# Altium PCB PCB3.PcbDoc
Units mm, origin at the board's own origin, x right, y up, seen from the top; angles counter-clockwise.
Board outline 57 x 43 mm, 2 copper layers (Top Layer, Bottom Layer); 20 components, 11 nets, 58 pads, 0 vias.
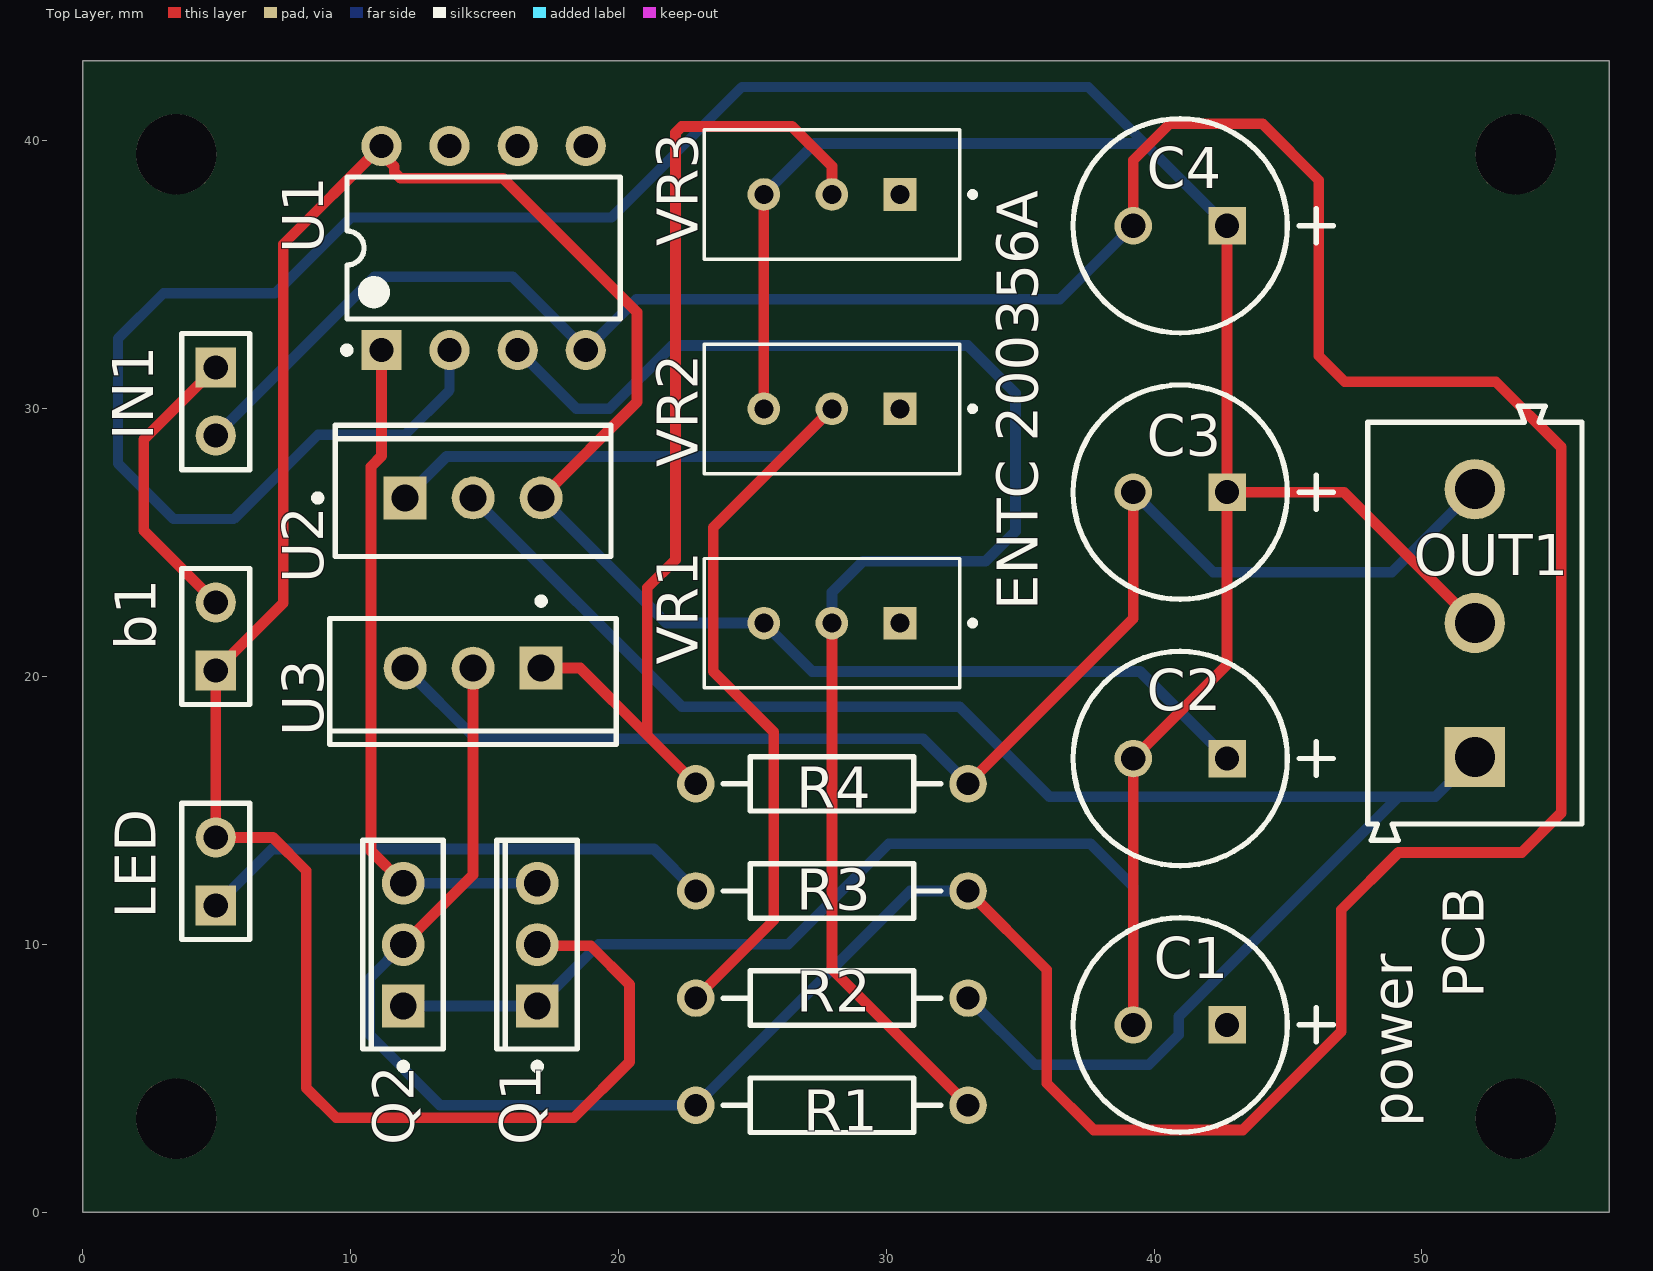
[diagram p0: Top Layer view]
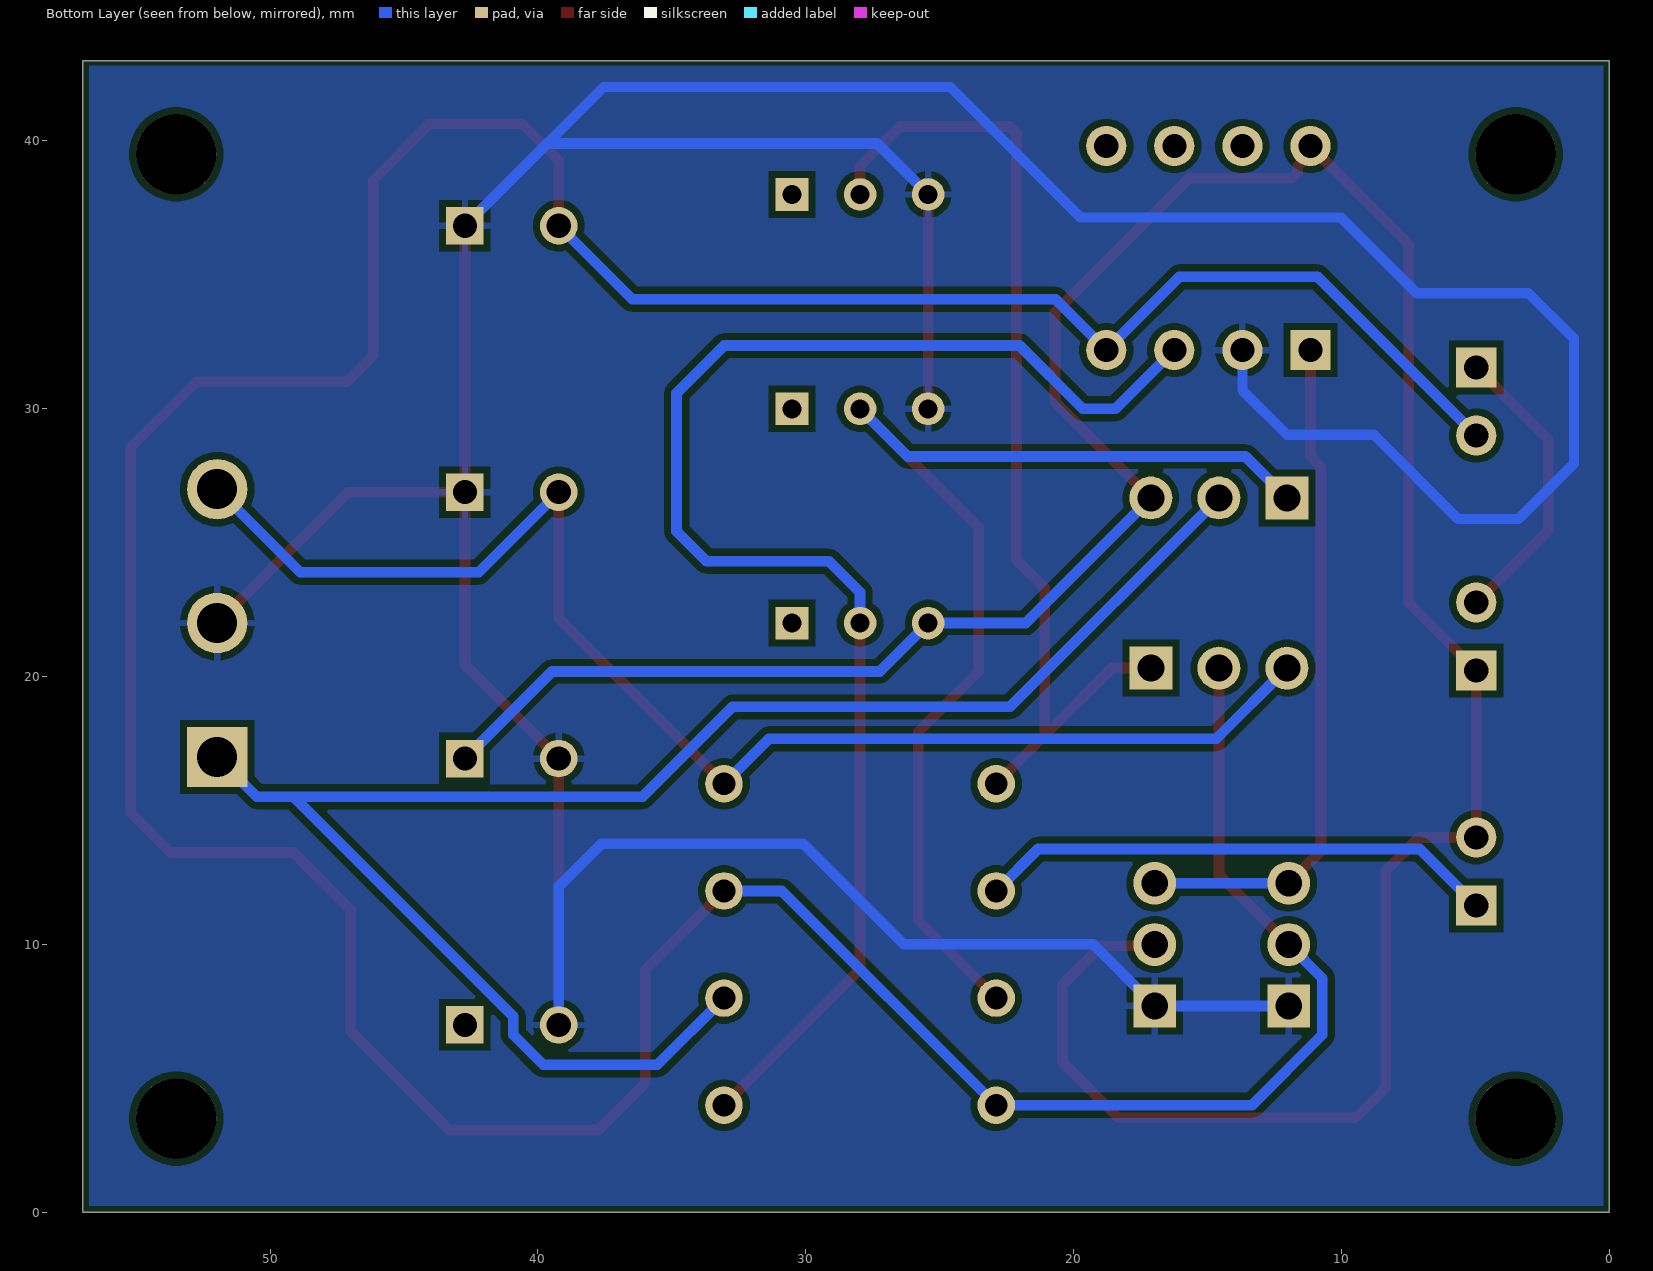
[diagram p1: Bottom Layer view, seen from below]

## Layer stack, top to bottom
Top Solder: solder mask 0.0102, Solder Resist, Dk 3.5
Top Layer: signal copper 0.0356
Dielectric 1: dielectric 0.32, FR-4, Dk 4.8
Bottom Layer: signal copper 0.0356
Bottom Solder: solder mask 0.0102, Solder Resist, Dk 3.5

## Board outline
0,0 57,0 56.998,43 0,43

## Design rules (kind name [scope] priority, off if disabled: settings)
Clearance [All] p1: gap=0.254 ignorepadtopadclearanceinfootprint=FALSE
PolygonConnect [All] p1: connectstyle=Relief reliefconductorwidth=0.254 reliefentries=4 polygonreliefangle="90 Angle" airgapwidth=0.254
RoutingVias [All] p1: holewidth=0.711 width=1.27 viastyle="Through Hole" minholewidth=0.711 minwidth=1.27 maxholewidth=0.711 maxwidth=1.27
SolderMaskExpansion [All] p1: expansion=0.102 istentingtop=FALSE
Width [All] p1: maxlimit=0.508 minlimit=0.254 preferedwidth=0.4
30 further rules are at their usual default settings.

## Components (designator, comment, footprint, x,y, rotation, side; value= is the part's Value field where it differs from the comment)
b1 "Header 2" HDR1X2 4.975,20.23 r90 top
C1 "ECA1HM101" CAPPR65-350-1150X800X1250 40.975,7 r180 top value=100µF
C2 "ECA1HM101" CAPPR65-350-1150X800X1250 40.975,16.943 r180 top value=100µF
C3 "ECA1HM101" CAPPR65-350-1150X800X1250 40.975,26.887 r180 top value=100µF
C4 "ECA1HM101" CAPPR65-350-1150X800X1250 40.975,36.83 r180 top value=100µF
IN1 "Header 2" HDR1X2 4.975,31.54 r270 top
LED "Header 2" HDR1X2 4.975,11.46 r90 top
OUT1 "691111710003" 691111710003 51.975,22 r90 top
Q1 "BD139" ONSC-TO-225-3-77-09 16.975,10 r180 top
Q2 "BD140" ONSC-TO-225-3-77-09 11.975,10 r180 top
R1 "100k" AXIAL-0.4 27.975,4 r0 top value=1K
R2 "100k" AXIAL-0.4 27.975,8 r180 top value=1K
R3 "10k" AXIAL-0.4 27.975,12 r180 top
R4 "100k" AXIAL-0.4 27.975,16 r180 top value=1K
U1 "TL072CP" P0008A 14.975,36 r90 top
U2 "LM317TG" ONSC-TO-220-3-221AB-01 14.58,26.67 r90 top
U3 "LM337T/NOPB" NDE0003A 14.58,20.32 r180 top
VR1 "100k" TRIM_3296W-1-250 27.975,22 r180 top
VR2 "3296W-1-250" TRIM_3296W-1-250 27.975,30 r180 top
VR3 "3296W-1-250" TRIM_3296W-1-250 27.975,38 r180 top

## Footprints (in the part's own frame and the unit in brackets; to place one, negate y for a bottom-side part, rotate by r counter-clockwise, add the part's x,y. Pads: shape width x height; smd on the part's side, far side on the other; paste and mask are expansions set on the pad)
691111710003 [mm] "5,00mm - modular - green - Horizontal entry with pressure clamp - 10,0mm height - 03p"
  rect 2.25x2.25 hole 1.5: 1(-5,0)
  round 2.25 hole 1.5: 2(0,0) 3(5,0)
  silkscreen extent -8.1,-4 8.1,4, body extent -8.1,-4 8.1,4, height 11.05
AXIAL-0.4 [mm] "Axial Device, Thru-Hole; 2 Leads; 0.4 in Pin Spacing"
  round 1.4 hole 0.85: 1(-5.08,0) 2(5.08,0)
  silkscreen extent -4.06,-1.02 4.06,1.02
CAPPR65-350-1150X800X1250 [mm] "THD, 2-Leads, Dia 8mm, Pin Spacing 3.5mm"
  rect 1.4x1.4 hole 0.9: 1(-1.75,0)
  round 1.4 hole 0.9: 2(1.75,0)
  silkscreen extent -5.72,-4 4,4, body extent -4,-4 3.95,4, height 12.5
HDR1X2 [mm] "Connector; Header; 2 Position"
  rect 1.5x1.5 hole 0.9: 1(0,0)
  round 1.5 hole 0.9: 2(2.54,0)
  silkscreen extent -1.27,-1.27 3.81,1.27
NDE0003A [mm] "FM, 3-Leads, Body 10.7x4.7mm, Pitch 2.54mm"
  rect 1.6x1.6 hole 1: 1(-2.54,0)
  round 1.6 hole 1: 2(0,0) 3(2.54,0)
  silkscreen extent -5.35,-2.62 5.35,2.85, body extent -5.4,-1.9 5.4,2.9, height 19.4
ONSC-TO-220-3-221AB-01 [mm] "FM, 3-Leads, Body 10.3x4.85mm, Pitch 2.54mm"
  rect 1.6x1.6 hole 1: 1(0,2.54)
  round 1.6 hole 1: 2(0,0) 3(0,-2.54)
  silkscreen extent -2.19,-5.15 2.72,5.92, body extent -2.16,-5.15 2.69,5.15, height 19.68
ONSC-TO-225-3-77-09 [mm] "FM, 3-Leads, Body 7.8x3mm, Pitch 2.29mm"
  rect 1.6x1.6 hole 1: 1(0,2.29)
  round 1.6 hole 1: 2(0,0) 3(0,-2.29)
  silkscreen extent -1.49,-3.9 1.51,4.67, body extent -1.49,-3.9 1.51,3.9, height 13.64
P0008A [mm] "DIP, 8-Leads, Body 10.15x6.6mm, Pitch 2.54mm"
  rect 1.5x1.5 hole 0.9: 1(-3.81,3.81)
  round 1.5 hole 0.9: 2(-3.81,1.27) 3(-3.81,-1.27) 4(-3.81,-3.81) 5(3.81,-3.81) 6(3.81,-1.27) 7(3.81,1.27) 8(3.81,3.81)
  silkscreen extent -3.93,-5.1 2.65,5.23, body extent -3.95,-5.07 3.95,5.07, height 5.08
TRIM_3296W-1-250 [mm]
  rect 1.218x1.218 / inner round 1.218 / far side rect 1.218x1.218 hole 0.71: 1(-2.54,0)
  round 1.218 hole 0.71: 2(0,0) 3(2.54,0)
  silkscreen extent -5.35,-2.41 4.76,2.42, body extent -4.76,-2.41 4.76,2.42, height 11.55

## Part data
b1 IN1 LED: "Header, 2-Pin", LatestRevisionDate=17-Jul-2002, LatestRevisionNote="Re-released for DXP Platform.", Publisher="Altium Limited"
C1 C2 C3 C4: library part CMP-001-00026-7, "Aluminum Electrolytic Capacitor, 100 uF, +/- 20%, 50 V, -40 to 85 degC, 2-Pin THD, RoHS, Bulk", Capacitor Type=Electrolytic, Case/Package=Radial, Manufacturer=Panasonic, Max Operating Temperature=85°C, Min Operating Temperature=-40°C, Package Description="2-Pin Radial Lead, Dia 8 mm, Height 12.5 mm", Package Quantity=200, Package Reference=CAPPR65-350-1150X800X1250, Ripple Current=250mA, Tolerance=20%, Voltage Rating=50V, Datasheet URL=https://industrial.panasonic.com/cdbs/www-data/pdf/RDF0000/ABA0000C1218.pdf, Datasheet Version="Rev. 05, 10/2016", Diameter=8mm, Lead Pitch=3.5mm, Manufacturer URL=http://www.panasonic.com/, Mounting Technology=TH, Packaging=Bulk, Pins=2, Ripple Current (AC)=250mA, RoHS Compliant=True
OUT1: library part CMP-1502-03263-1, "Series 111 - 5.00 mm Horizontal Entry Modular with Pressure Clamp WR-TBL, 3 pin", Manufacturer="Wurth Elektronik", Operating Temperature=-40to105degC, Datasheet URL=http://katalog.we-online.de/em/datasheet/6911117100xx.pdf, Manufacturer URL=http://www.we-online.de, Mounting Technology=THT, Package Reference=691111710003, Packaging=Box, Part Number=691111710003, Pin Number=3, Pitch=5.00mm, Publisher=WurthElektronik
Q1: library part CMP-1048-01271-1, "Plastic Medium-Power Silicon NPN Transistor, 3-Pin TO-225, Bulk Box", Manufacturer="On Semiconductor", ComponentLink1Description="Manufacturer URL", ComponentLink1URL=http://www.onsemi.com/, ComponentLink2Description=Datasheet, ComponentLink2URL=http://www.onsemi.com/pub_link/Collateral/BD135-D.PDF, ComponentLink3Description="Package Specification", ComponentLink3URL=http://www.onsemi.com/pub_link/Collateral/77-09.PDF, DatasheetVersion="Rev. 16", IC Continuous (A)=1.5, Mounting Technology="Through Hole", PackageDescription="3-Pin Flange Mount, Vertical Straight Lead, Body 7.6 x 2.7 mm, Pitch 2.29 mm", PackageReference=TO-225-3-77-09, PackageVersion="Rev. AC, 12/2013", Packing="Bulk Box", PartNumber=BD139, Polarity=NPN, RoHS=FALSE
Q2: library part CMP-1048-00039-1, "Plastic Medium-Power Silicon PNP Transistor, 3-Pin TO-225, Bulk Box", Manufacturer="On Semiconductor", ComponentLink1Description="Manufacturer URL", ComponentLink1URL=http://www.onsemi.com/, ComponentLink2Description=Datasheet, ComponentLink2URL=http://www.onsemi.com/pub_link/Collateral/BD136-D.PDF, ComponentLink3Description="Package Specification", ComponentLink3URL=http://www.onsemi.com/pub_link/Collateral/77-09.PDF, DatasheetVersion="Rev. 15", IC Continuous (A)=1.5, Mounting Technology="Through Hole", PackageDescription="3-Pin Flange Mount, Vertical Straight Lead, Body 7.6 x 2.7 mm, Pitch 2.29 mm", PackageReference=TO-225-3-77-09, PackageVersion="Rev. AC, 12/2013", Packing="Bulk Box", PartNumber=BD140, Polarity=PNP, RoHS=FALSE
R1 R2 R3 R4: library part Res2, "Resistor", LatestRevisionDate=17-Jul-2002, LatestRevisionNote="Re-released for DXP Platform.", PackageDescription="Axial Device, Thru-Hole; 2 Leads; 0.4 in Pin Spacing", PackageReference=AXIAL-0.4, Published=8-Jun-2000, Publisher="Altium Limited"
U1: library part CMP-0017-00950-2, "Dual Low-Noise JFET-Input General-Purpose Operational Amplifier, 7 to 36 V, 0 to 70 degC, 8-pin DIP (P8), Pb-Free (RoHS)", Manufacturer="Texas Instruments", Rating=Catalog, Total Supply Voltage(Max)(+5V is 5, +/-5V is 10)=36, Total Supply Voltage(Min)(+5V is 5, +/-5V is 10)=7, CMRR(Min)(dB)=70, Code_JEDEC=MS-001, ComponentLink1Description="Manufacturer URL", ComponentLink1URL=http://www.ti.com/, ComponentLink2Description=Datasheet, ComponentLink2URL=http://www.ti.com/lit/ds/symlink/tl072.pdf, ComponentLink3Description="Package Specification", ComponentLink3URL=http://www.ti.com/litv/pdf/mpdi001b, DatasheetVersion=SLOS080J, Eco-Plan="Pb-Free (RoHS)", GBW(Typ)(MHz)=3, IIB(Max)(pA)=200, Iq per channel(Max)(mA)=2.5, Mounting Technology="Through Hole", Number of Channels=2, Offset Drift(Typ)(uV/C)=18, PackageDescription="8-Pin Plastic In-Line, Body 9.59 x 6.35 mm, Pitch 2.54 mm", PackageReference=P0008A, PackageVersion="4040082/E, 04/2010", PartNumber=TL072CP, Slew Rate(Typ)(V/us)=13, Sub Family="General Purpose Amplifier, High Supply Voltage Amplifier (>=30V)", Vio (25C)(Max)(mV)=10, Vn at 1kHz(Typ)(nV/rtHz)=18
U2: library part CMP-019-00023-1, "Adjustable Output, Positive Voltage Regulator, 1.5 A, 0 to 125 degC, 3-Pin TO-220 (221AB-01), Pb-Free, Rail", Case/Package=TO-220, Manufacturer="ON Semiconductor", Max Input Voltage=40V, Max Operating Temperature=125°C, Max Ouput Current=1.5A, Min Input Voltage=4.2V, Min Operating Temperature=0°C, Output Voltage=1.2V, Package Description="3-Pin Flange Mount, Vertical Straight Lead, Body 9.97 x 4.445 mm, Pitch 2.54 mm", Package Quantity=50, Package Reference=TO-220-3-221AB-01, Package Version="Rev. A, 11/2010", Datasheet URL=http://www.onsemi.com/pub_link/Collateral/LM317-D.PDF, Datasheet Version="Rev. 14, 01/2016", Manufacturer URL=http://www.onsemi.com/, Mounting Technology=TH, Output Current=1.5A, Outputs=1, Packaging=Rail/Tube, Pins=3, RoHS Compliant=True
U3: library part CMP-0062-02479-3, "3-Terminal Adjustable Negative Regulator, 3-pin TO-220, Pb-Free", Manufacturer="Texas Instruments", PackageTopMarking="NSUZXYTTE#*LM337T P+", PowerWise=N, ComponentLink1Description="Datasheet URL", ComponentLink1URL=http://www.ti.com/general/docs/lit/getliterature.tsp?genericPartNumber=LM337-N&fileType=pdf, CompType="LDO IC", PackageDescription="TO-220, Molded, 3 Lead, Straight", PackageReference=NDE0003A, PinCount=3, RoHS=Y
VR1: library part 3296W-1-250, "25 Ohms 0.5W, 1/2W PC Pins Through Hole Trimmer Potentiometer Cermet 25.0 Turn Top Adjustment", Package="NON STANDARD-3 Bourns", Availability="In Stock", Check_prices=https://www.snapeda.com/parts/3296W-1-250/Bourns/view-part/?ref=eda, MF=Bourns, MP=3296W-1-250, Price=None, Purchase-URL=https://pricing.snapeda.com/search/part/3296W-1-250/?ref=eda, SnapEDA_Link=https://www.snapeda.com/parts/3296W-1-250/Bourns/view-part/?ref=snap
VR2 VR3: "25 Ohms 0.5W, 1/2W PC Pins Through Hole Trimmer Potentiometer Cermet 25.0 Turn Top Adjustment", Package="NON STANDARD-3 Bourns", Availability="In Stock", Check_prices=https://www.snapeda.com/parts/3296W-1-250/Bourns/view-part/?ref=eda, MF=Bourns, MP=3296W-1-250, Price=None, Purchase-URL=https://pricing.snapeda.com/search/part/3296W-1-250/?ref=eda, SnapEDA_Link=https://www.snapeda.com/parts/3296W-1-250/Bourns/view-part/?ref=snap

## Free pads (board coordinates)
  round 3 hole 3: 6(3.5,39.5) 7(3.5,3.5) 8(53.5,3.5) 9(53.5,39.5)

## Nets (pads, with @x,y where several pads share a name; then routed paths per layer and width w, separated by ;. In a path a pad name is that pad's centre, name@x,y a point inside that pad or via, vN(x,y) a via of type N, cw(c..) or ccw(c..) an arc to the next point about the centre after c; other vN are vias at no path point)
+3.3V: OUT1.1 R2.1 U2.2 | length 64.3
  Bottom Layer w0.4: U2.2 22.377,18.872 32.741,18.872 36.093,15.519 49.124,15.519 ; R2.1 35.543,5.512 39.802,5.512 40.919,6.629 40.919,7.315 49.124,15.519 ; OUT1.1 50.494,15.519 49.124,15.519
+power: b1.1 C2.1 LED.2 Q1.2 U1.8 U2.3 VR1.3 | length 111.2
  Top Layer w0.4: Q1.2 17.018,9.957 18.974,9.957 20.422,8.509 20.422,5.613 18.339,3.531 9.474,3.531 8.357,4.648 8.357,12.751 7.107,14 LED.2 b1.1 7.493,22.748 7.493,36.138 U1.8 11.165,39.512 11.633,39.044 11.633,38.84 11.868,38.606 15.699,38.606 20.701,33.604 20.701,30.251 U2.3
  Bottom Layer w0.4: U2.3 21.79,22 VR1.3 27.242,20.193 39.475,20.193 C2.1
-3.3V: C3.2 OUT1.3 R4.1 U3.3 | length 51.5
  Top Layer w0.4: R4.1 39.225,22.17 C3.2
  Bottom Layer w0.4: U3.3 14.681,17.678 31.376,17.678 R4.1 ; C3.2 42.21,23.901 48.876,23.901 OUT1.3
-power: C4.2 IN1.2 Q2.2 R1.1 R3.1 U1.4 U3.2 | length 159.2
  Top Layer w0.4: Q2.2 14.58,12.605 U3.2 ; R3.1 35.992,9.063 35.992,4.826 37.744,3.073 43.307,3.073 46.99,6.756 46.99,11.303 49.124,13.437 53.721,13.437 55.194,14.91 55.194,28.575 52.756,31.013 47.117,31.013 46.152,31.979 46.152,38.532 44.044,40.64 40.589,40.64 39.225,39.275 C4.2
  Bottom Layer w0.4: IN1.2 10.9,34.925 16.05,34.925 U1.4 20.681,34.087 36.481,34.087 C4.2 ; Q2.2 10.719,8.744 10.719,6.629 13.348,4 R1.1 30.895,12 R3.1
feedback: C1.2 C2.2 C3.1 C4.1 OUT1.2 Q1.1 Q2.1 U1.2 VR2.3 VR3.3 | length 170
  Top Layer w0.4: VR2.3 VR3.3 ; C1.2 C2.2 42.725,20.443 C3.1 ; C4.1 C3.1 ; OUT1.2 47.088,26.887 C3.1
  Bottom Layer w0.381: U1.2 13.705,30.697 12.04,29.032 8.788,29.032 5.639,25.883 3.404,25.883 1.321,27.965 1.321,32.614 3.023,34.315 7.188,34.315 10.008,37.135 14.351,37.135 14.353,37.137 19.738,37.137 24.613,42.012 37.543,42.012 39.651,39.903
  Bottom Layer w0.4: Q2.1 Q1.1 19.272,10.008 26.34,10.008 30.099,13.767 37.624,13.767 39.225,12.167 C1.2 ; VR3.3 27.338,39.903 39.651,39.903 C4.1
GND: R1.2 U1.3 VR1.2 | length 55.4
  Top Layer w0.4: VR1.2 27.975,9.08 R1.2
  Bottom Layer w0.4: U1.3 18.437,29.997 19.66,29.997 22.022,32.36 33.045,32.36 34.823,30.582 34.823,25.425 33.706,24.308 29.134,24.308 27.975,23.149 VR1.2
Netb1_2: b1.2 IN1.1 | length 11
  Top Layer w0.4: b1.2 2.286,25.459 2.286,28.851 IN1.1
NetLED_1: LED.1 R3.2 | length 19.4
  Bottom Layer w0.4: LED.1 7.078,13.564 21.331,13.564 R3.2
NetQ1_3: Q1.3 Q2.3 U1.1 | length 25.6
  Top Layer w0.4: U1.1 11.165,28.233 10.77,27.838 10.77,13.495 Q2.3
  Bottom Layer w0.4: Q2.3 Q1.3
NetR2_2: R2.2 U2.1 VR2.2 | length 43.3
  Top Layer w0.4: R2.2 25.806,10.912 25.806,17.932 23.546,20.193 23.546,25.571 VR2.2
  Bottom Layer w0.4: U2.1 13.589,28.219 26.194,28.219 VR2.2
NetR4_2: R4.2 U3.1 VR3.2 | length 38.1
  Top Layer w0.4: U3.1 18.575,20.32 21.082,17.813 ; R4.2 21.082,17.813 ; VR3.2 27.975,39.05 26.486,40.538 22.367,40.538 22.132,40.304 22.132,24.368 21.082,23.317 21.082,17.813
pads on no net: C1.1 U1.5 U1.6 U1.7 VR1.1 VR2.1 VR3.1

## Polygon pours and split planes (outlines as drawn)
feedback on Bottom Layer "FEEDBACK_L02_P001" (solid, remove dead copper, pour order 1): 0.229,0.254 56.744,0.254 56.744,42.799 0.229,42.799

## Silkscreen, mask and mechanical layers (free items; w line width, h text height)
Top Overlay:
  text "ENTC 200356A" at 35.662,22.479 h1.52 r90
  text "PCB" at 52.299,8.001 h1.52 r90
  text "power" at 49.632,3.175 h1.52 r90